# Altium PCB ElectricCircuitTester.PcbDoc
Units mil, origin at the board's own origin, x right, y up, seen from the top; angles counter-clockwise.
Board outline 8736.22 x 4181.1 mil, 2 copper layers (Top Layer, Top, Bottom Layer, Bottom); 16 components, 11 nets, 38 pads, 0 vias.
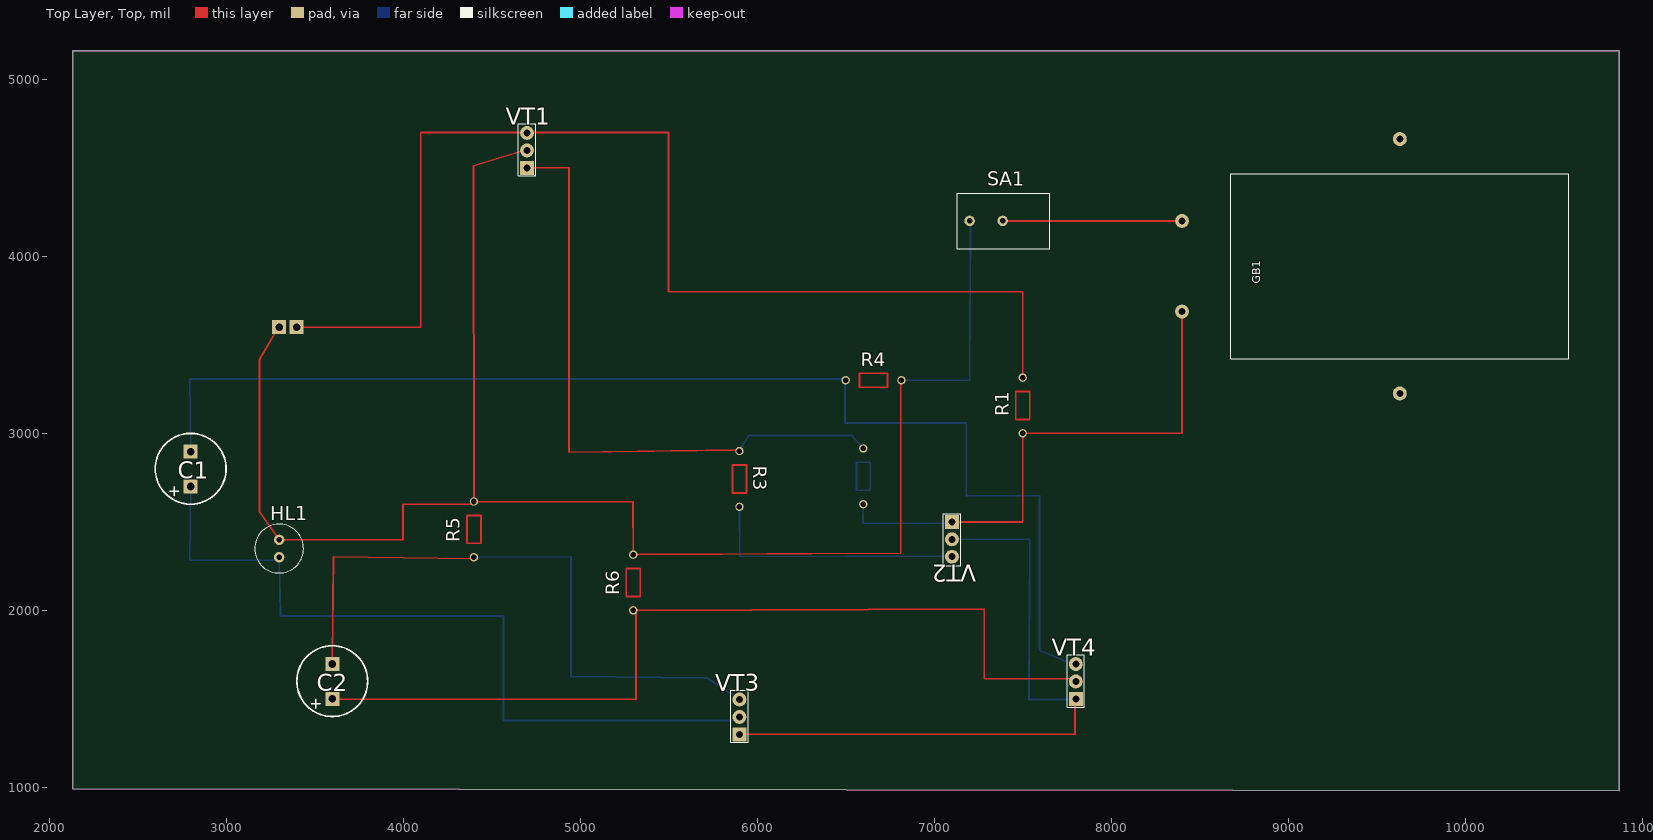
[diagram p0: Top Layer, Top view]
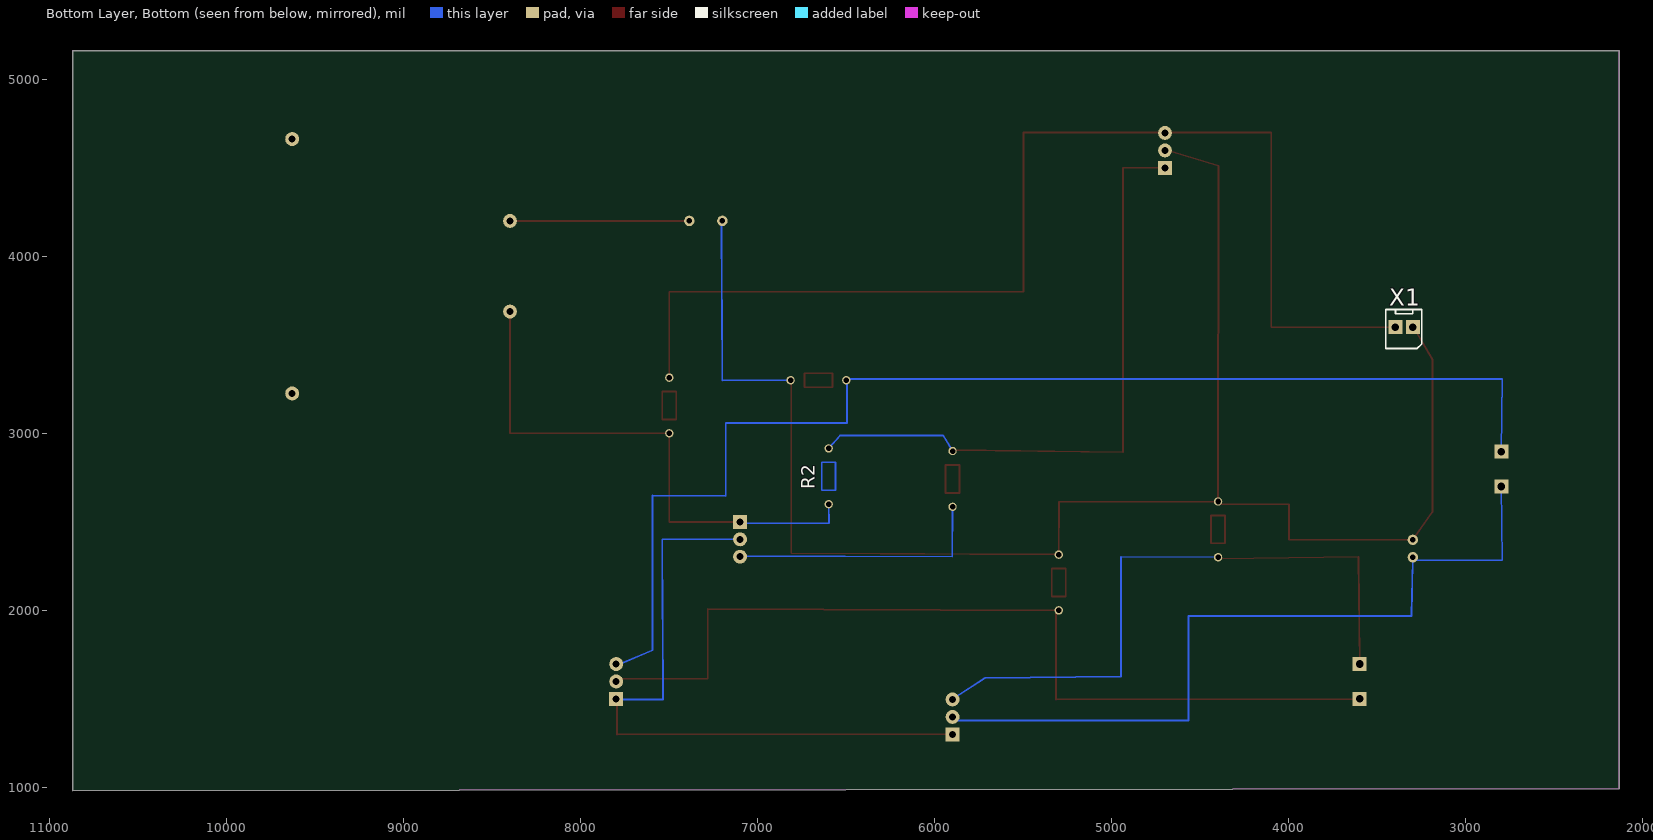
[diagram p1: Bottom Layer, Bottom view, seen from below]

## Layer stack, top to bottom
Top Solder, Top Mask: solder mask 0.4, Solder Resist, Dk 3.5
Top Layer, Top: signal copper 1.4
Dielectric 1: dielectric 12.6, FR-4, Dk 4.8
Bottom Layer, Bottom: signal copper 1.4
Bottom Solder, Bot Mask: solder mask 0.4, Solder Resist, Dk 3.5

## Board outline
2133.86,5161.42 2133.86,992.13 10870.08,980.32 10870.08,5161.42

## Design rules (kind name [scope] priority, off if disabled: settings)
Clearance [All] p1: gap=10 ignorepadtopadclearanceinfootprint=FALSE except(0: Arc-Hole Track-Hole SMDPad-Hole THPad-Hole Via-Hole Fill-Hole Poly-Hole Region-Hole Text-Hole; 11.81: Arc-Arc Arc-Track Arc-THPad Arc-Via Track-Track Track-THPad Track-Via THPad-THPad THPad-Via Via-Via)
PlaneClearance [All] p1: clearance=10
PolygonConnect [All] p1: connectstyle=Relief reliefconductorwidth=10 reliefentries=4 polygonreliefangle="90 Angle" airgapwidth=10
RoutingVias [All] p1: holewidth=28 width=50 viastyle="Through Hole" minholewidth=28 minwidth=50 maxholewidth=28 maxwidth=50
SolderMaskExpansion [All] p1: expansion=4 istentingtop=FALSE
Width [All] p1: maxlimit=10 minlimit=10 preferedwidth=10
29 further rules are at their usual default settings.

## Components (designator, comment, footprint, x,y, rotation, side; value= is the part's Value field where it differs from the comment)
C1 "" K5035-3_Primary 2800,2700 r0 top
C2 "" K5035-3_Primary 3600,1500 r0 top
GB1 "" KRONA_KRONA(Primary) 8400,4200 r90 top
HL1 "{Value}" HL_MINI 3300,2300 r0 top
R1 "" R100 7500,3000 r90 top
R2 "" R100 6600,2600 r90 bottom
R3 "" R100 5900,2900 r270 top
R4 "" R100 6500,3300 r0 top
R5 "" R100 4400,2300 r90 top
R6 "" R100 5300,2000 r90 top
SA1 "" MTS-101 7200,4200 r0 top
VT1 "" KT13_КТ315Б(Primary) 4700,4500 r0 top
VT2 "" KT13_КТ315Б(Primary) 7100,2500 r180 top
VT3 "" KT13_КТ315Б(Primary) 5900,1300 r0 top
VT4 "" KT13_КТ315Б(Primary) 7800,1500 r0 top
X1 "" WF2 3300,3600 r180 bottom

## Footprints (in the part's own frame and the unit in brackets; to place one, negate y for a bottom-side part, rotate by r counter-clockwise, add the part's x,y. Pads: shape width x height; smd on the part's side, far side on the other; paste and mask are expansions set on the pad)
HL_MINI [mm]
  round 1.5 hole 0.8: 1(0,0) 2(0,2.5)
  silkscreen extent -3.5,-2.25 3.5,4.75
K5035-3_Primary [mm]
  rect 2x2 hole 1.1: 1(0,0) 2(0,5)
  silkscreen extent -5.08,-2.54 5.08,7.62
KRONA_KRONA(Primary) [mm]
  round 2 hole 1: 1(11.75,-31.25) 2(-24.75,-31.25) minus(-13,0) plus(0,0)
  silkscreen extent -19.75,-55.5 6.75,-7
KT13_КТ315Б(Primary) [mm]
  rect 2x2 hole 1: 1(0,0)
  round 2 hole 1: 2(0,5) 3(0,2.5)
  silkscreen extent -1.25,-1.17 1.25,6.33
MTS-101 [mm]
  round 1.5 hole 0.8: 1(0,0) 2(4.75,0)
  silkscreen extent -1.75,-4 11.5,4
R100 [mm]
  round 1.2 hole 0.8: 1(0,0) 2(8,0)
  Top Layer, Top lines w0.254: 2,1 6,1 6,-1 2,-1 2,1
WF2 [mm]
  rect 2x2 hole 1.1: 1(0,0) 2(-2.5,0)
  silkscreen extent -3.89,-3.05 1.27,2.54

## Nets (pads, with @x,y where several pads share a name; then routed paths per layer and width w, separated by ;. In a path a pad name is that pad's centre, name@x,y a point inside that pad or via, vN(x,y) a via of type N, cw(c..) or ccw(c..) an arc to the next point about the centre after c; other vN are vias at no path point)
NET00001: HL1.2 R4.2 R5.2 R6.2 SA1.1 VT1.3 X1.1 | length 9828.2
  Top Layer, Top w10: X1.1 3295.28,3598.43 3188.98,3417.32 3188.98,2555.12 HL1.2 4000,2400 4000,2600 4400,2600 R5.2 ; VT1.3 4696.85,4602.36 4397.64,4511.81 R5.2 ; R6.2@5300,2300 R6.2 ; R4.2 6811.02,3307.09 6811.02,2322.83 R6.2 ; R5.2 5299.21,2614.17 R6.2
  Bottom Layer, Bottom w10: R4.2 7200.79,3299.21 7204.72,4212.6 SA1.1
NET00002: R1.2 VT1.2 X1.2 | length 6589.8
  Top Layer, Top w10: X1.2 4100,3600 4100,4700 VT1.2@4700,4700 ; VT1.2 VT1.2@4700,4700 ; R1.2 7500,3800 5500,3800 5500,4700 VT1.2@4700,4700
NET00004: R3.2 VT2.2 | length 1501.5
  Bottom Layer, Bottom w10: R3.2 5901.57,2303.15 7110.24,2307.09 VT2.2
NET00005: R2.2 R3.1 VT1.1 | length 3603.3
  Top Layer, Top w10: VT1.1 4937.01,4500 4937.01,2893.7 5901.57,2905.51 R3.1
  Bottom Layer, Bottom w10: R3.1 5897.64,2897.64 5952.76,2988.19 6535.43,2988.19 R2.2
NET00006: C2.2 R5.1 VT3.2 | length 3620.6
  Top Layer, Top w10: C2.2 3606.3,2303.15 4397.64,2291.34 R5.1
  Bottom Layer, Bottom w10: R5.1 4948.82,2303.15 4948.82,1625.98 5716.54,1618.11 5897.64,1500 VT3.2
NET00007: C1.2 R4.1 VT4.2 | length 6974.6
  Bottom Layer, Bottom w10: C1.2 2795.28,3307.09 R4.1@6496.06,3307.09 ; R4.1 R4.1@6496.06,3307.09 ; VT4.2 7779.53,1696.85 7594.49,1775.59 7594.49,2649.61 7181.1,2645.67 7181.1,3059.06 6496.06,3059.06 R4.1@6496.06,3307.09
NET00008: C1.1 HL1.1 VT3.3 | length 4488.1
  Bottom Layer, Bottom w10: C1.1 2795.28,2283.46 HL1.1@3300.35,2283.46 ; VT3.3 5905.51,1377.95 4566.93,1377.95 4566.93,1968.5 3307.09,1968.5 HL1.1@3300.35,2283.46 ; HL1.1@3300.35,2283.46 3307.09,2283.46 HL1.1 HL1.1@3300.35,2283.46
NET00009: C2.1 R6.1 VT4.3 | length 5149.1
  Top Layer, Top w10: C2.1 5314.96,1496.06 R6.1@5314.96,2000.06 ; VT4.3 7795.28,1614.17 7283.46,1614.17 7283.46,2007.87 R6.1@5314.96,2000.06 ; R6.1@5314.96,2000.06 R6.1 5314.96,2007.87 R6.1@5314.96,2000.06
NET00010: GB1.plus SA1.2 | length 1013
  Top Layer, Top w10: SA1.2 GB1.plus
NET00012: GB1.minus R1.1 R2.1 VT2.1 | length 3120.8
  Top Layer, Top w10: VT2.1 7500,2500 R1.1 8400,3000 GB1.minus
  Bottom Layer, Bottom w10: R2.1 6598.43,2492.13 7110.24,2492.13 VT2.1
NET00013: VT2.3 VT3.1 VT4.1 | length 3715.9
  Top Layer, Top w10: VT3.1 7795.28,1299.21 7795.28,1496.06 VT4.1
  Bottom Layer, Bottom w10: VT2.3 7539.37,2401.57 7535.43,1496.06 7803.15,1496.06 VT4.1
pads on no net: GB1.1 GB1.2

## Keep-outs
Keep-Out Layer, Board:
  the board outline again, w5

## Text inside footprints (layer, text, board x,y; h text height)
VT1: Mechanical 1, Top Assy "Б" at 4611.42,4680.31 h78.12; Mechanical 1, Top Assy "К" at 4611.42,4581.89 h78.12; Mechanical 1, Top Assy "Э" at 4611.42,4473.62 h78.12
VT2: Mechanical 1, Top Assy "Б" at 7188.58,2319.69 h78.12 r180; Mechanical 1, Top Assy "К" at 7188.58,2418.11 h78.12 r180; Mechanical 1, Top Assy "Э" at 7188.58,2526.38 h78.12 r180
VT3: Mechanical 1, Top Assy "Б" at 5811.42,1480.32 h78.12; Mechanical 1, Top Assy "К" at 5811.42,1381.89 h78.12; Mechanical 1, Top Assy "Э" at 5811.42,1273.62 h78.12
VT4: Mechanical 1, Top Assy "Б" at 7711.42,1680.32 h78.12; Mechanical 1, Top Assy "К" at 7711.42,1581.89 h78.12; Mechanical 1, Top Assy "Э" at 7711.42,1473.62 h78.12